# Altium PCB FC_MainBoard.PcbDoc (part 1 of 2)
Units mil, origin at the board's own origin, x right, y up, seen from the top; angles counter-clockwise.
Board outline 7630 x 3525 mil, 4 copper layers (Top Layer, Mid-Layer 1, Mid-Layer 2, Bottom Layer); 75 components, 79 nets, 708 pads, 334 vias.
Unrouted connection lines stored in the file: 1.
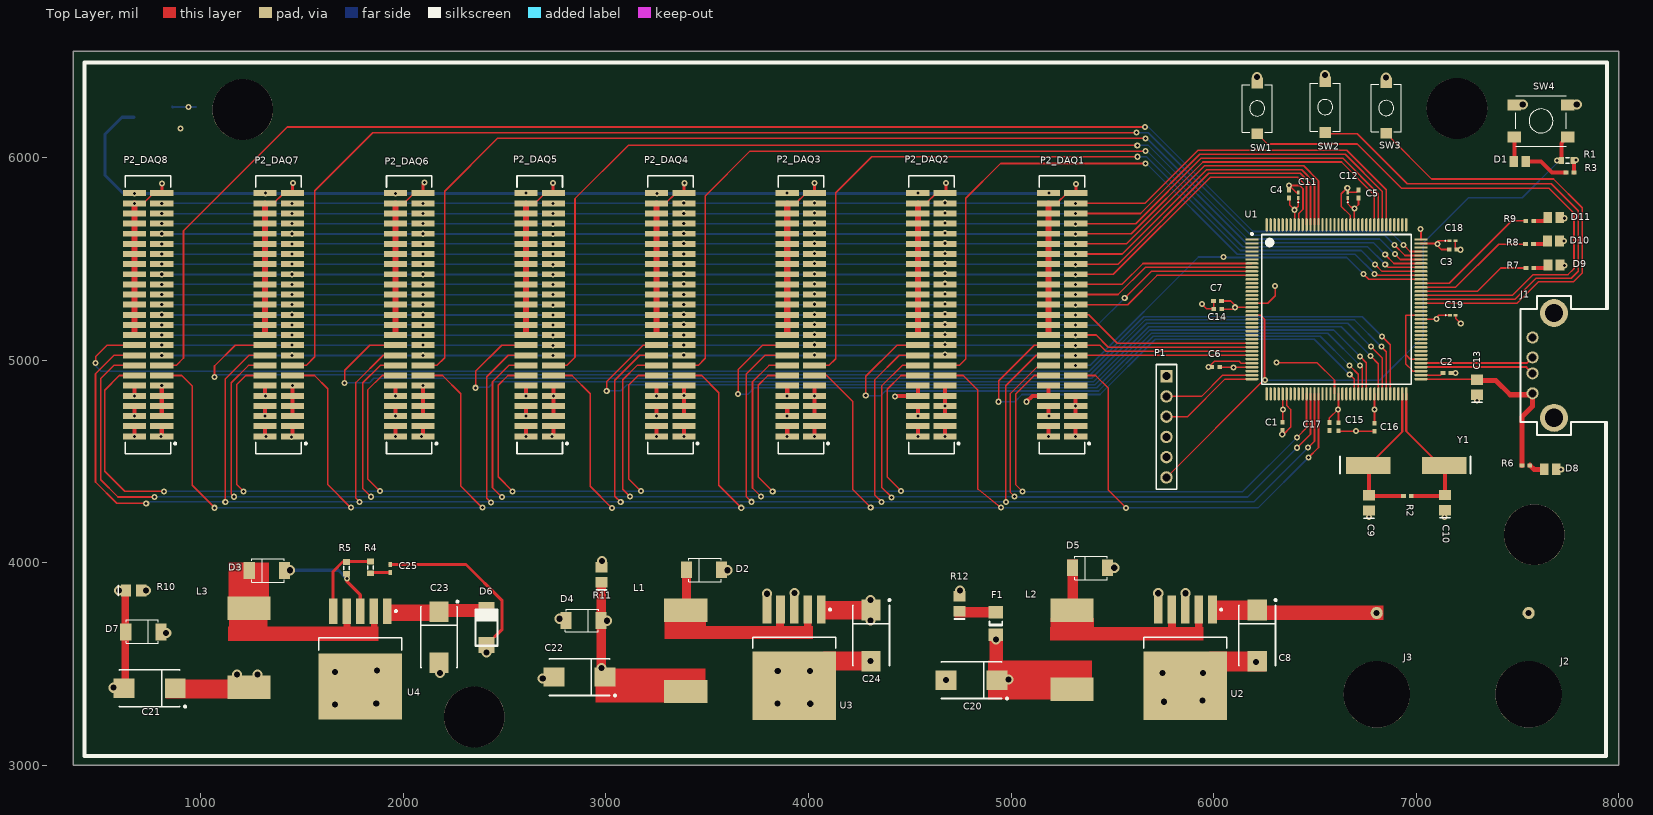
[diagram p0: Top Layer view]
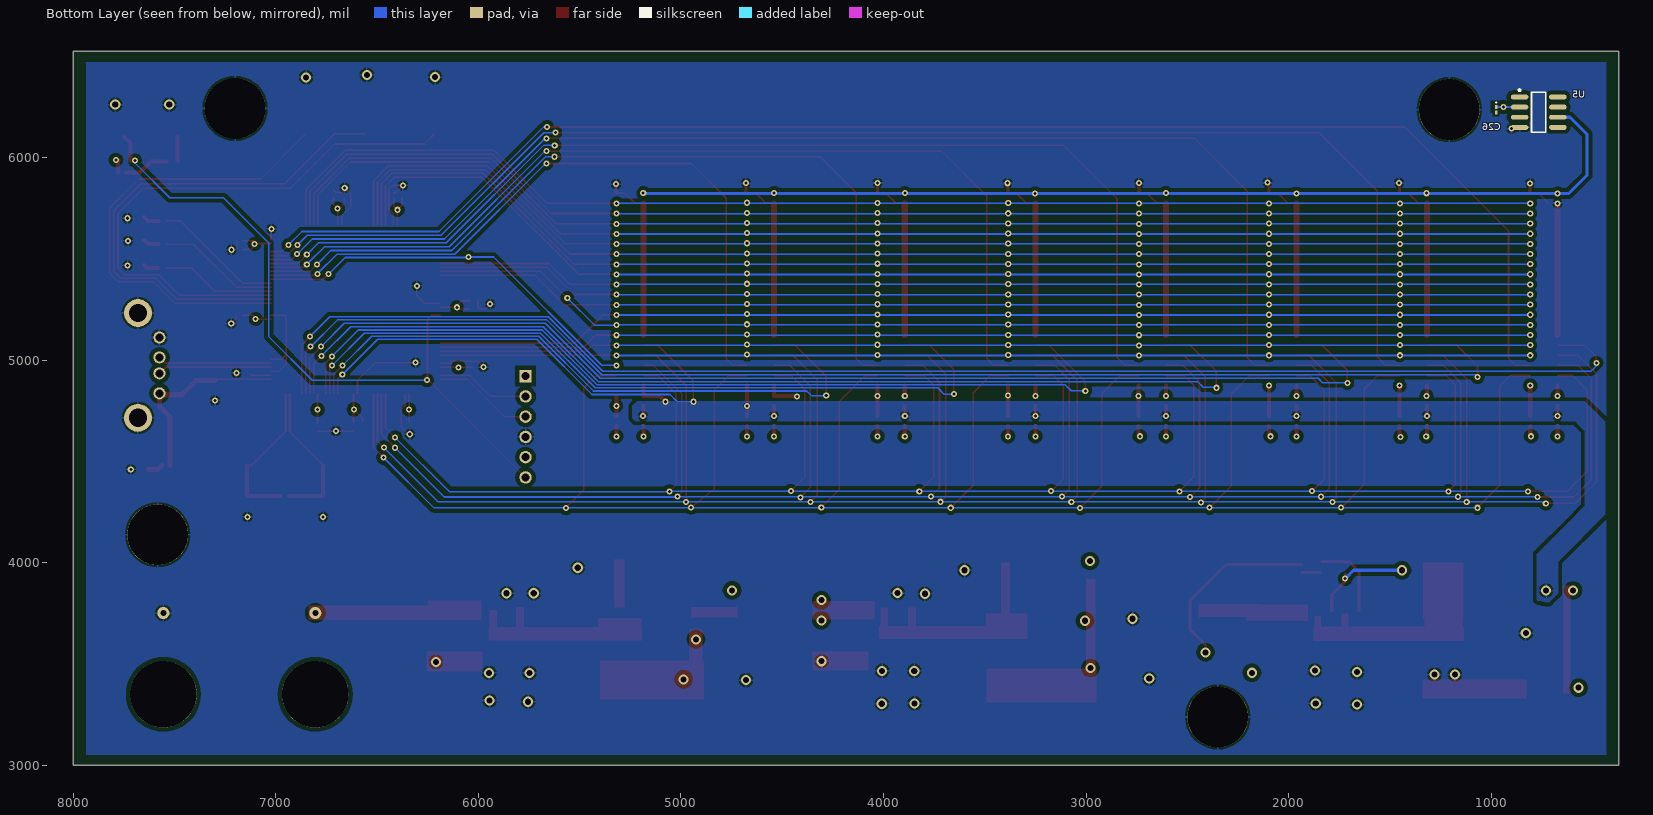
[diagram p1: Bottom Layer view, seen from below]
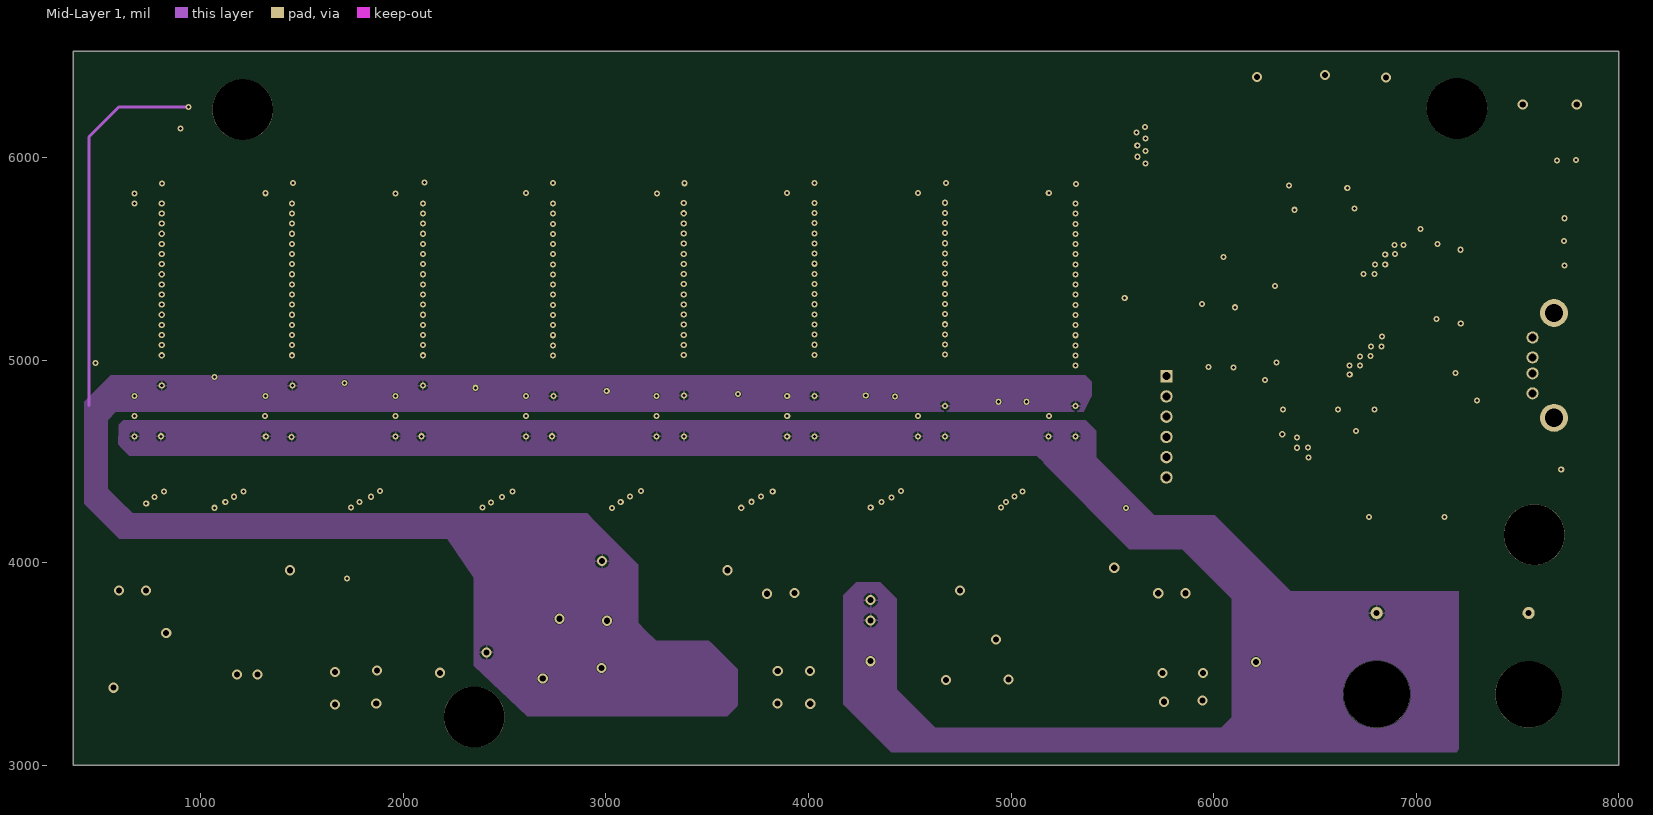
[diagram p2: Mid-Layer 1]
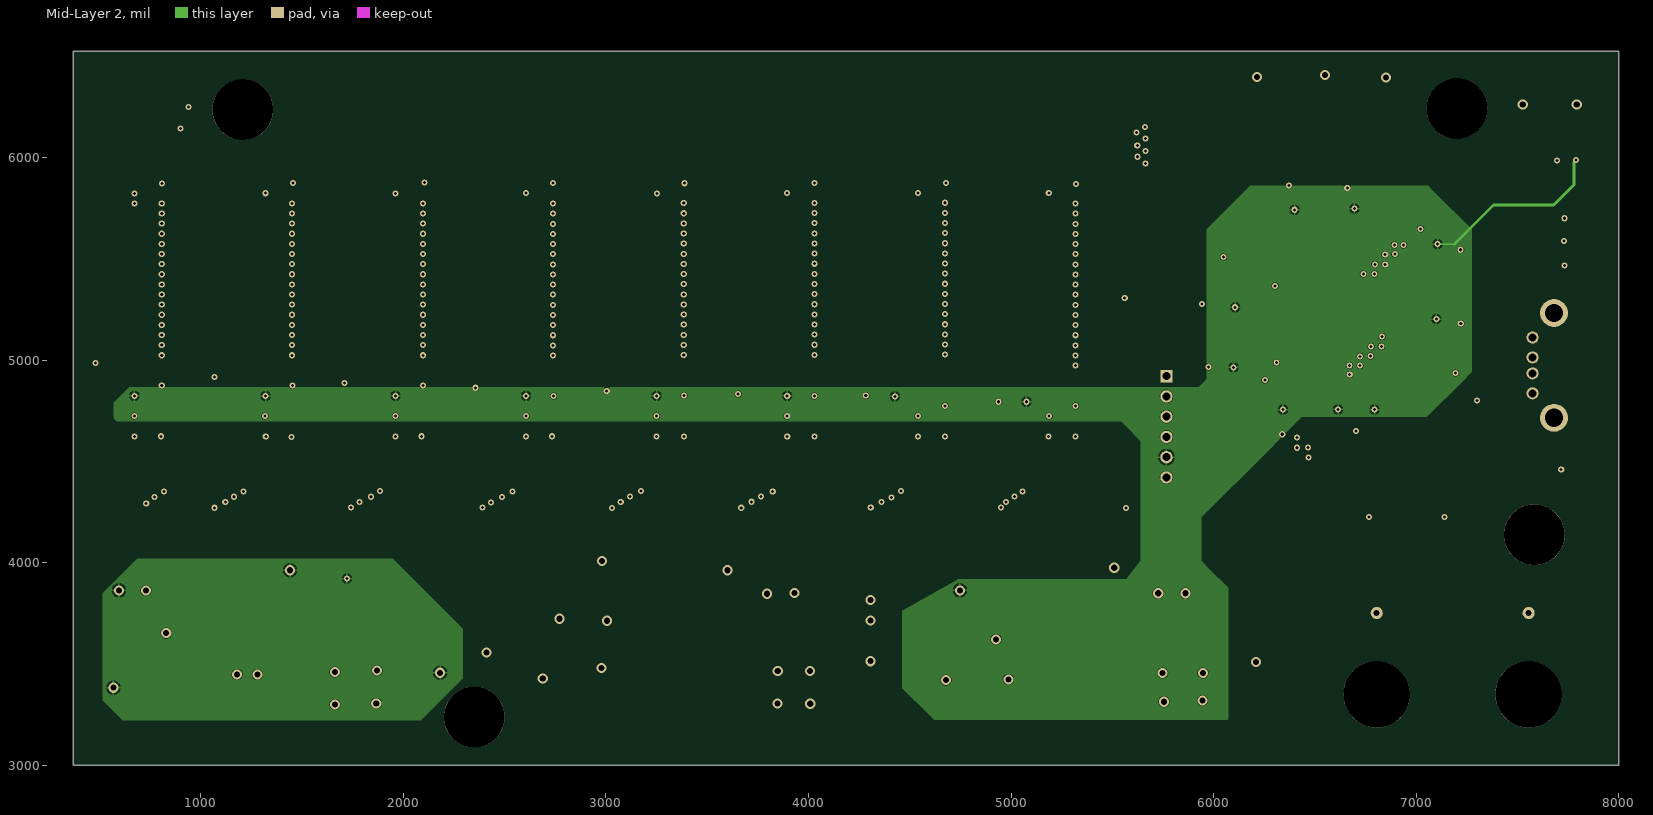
[diagram p3: Mid-Layer 2]

## Layer stack, top to bottom
Top Solder: solder mask 0.4, Solder Resist, Dk 3.5
Top Layer: signal copper 1.4
Dielectric 1: dielectric 12.6, FR-4, Dk 4.8
Mid-Layer 1: signal copper 1.4
Dielectric2: dielectric 12.6, FR-4, Dk 4.8
Mid-Layer 2: signal copper 1.4
Dielectric3: dielectric 12.6, FR-4, Dk 4.8
Bottom Layer: signal copper 1.4
Bottom Solder: solder mask 0.4, Solder Resist, Dk 3.5

## Board outline
370,3000 8000,3000 8000,6525 370,6525

## Design rules (kind name [scope] priority, off if disabled: settings)
Clearance [All] p1: gap=20
Clearance "GND Poly Clearance" [InPolygon vs InPolygon] p2: gap=20
Clearance "Polygon Clearance" [InPolygon] p3: gap=20
ComponentClearance [All] p1 off: gap=10 collisioncheckmode=3 verticalgap=10 showdistances=FALSE
DiffPairsRouting [All] p1: maxlimit=10 minlimit=10 mostfreqgap=10 toplayer_minwidth=10 toplayer_maxwidth=30 toplayer_prefwidth=10 midlayer1_minwidth=10 midlayer1_maxwidth=30 midlayer1_prefwidth=10 midlayer2_minwidth=10 midlayer2_maxwidth=30 midlayer2_prefwidth=10 bottomlayer_minwidth=10 bottomlayer_maxwidth=30 bottomlayer_prefwidth=10 maxuncoupledlength=500
Height [All] p1 off: minheight=0 maxheight=1000 prefheight=500
HoleSize [All] p1: absolutevalues=TRUE maxlimit=400 minlimit=1 maxpercent=80.000 minpercent=20.000
MinimumSolderMaskSliver [All] p1: minsoldermaskwidth=0
PolygonConnect PolygonConnect_1 [All] p1: connectstyle=Relief reliefconductorwidth=10 reliefentries=4 polygonreliefangle="90 Angle" airgapwidth=10
PolygonConnect [All] p2 off: connectstyle=Relief reliefconductorwidth=10 reliefentries=4 polygonreliefangle="90 Angle" airgapwidth=10
RoutingVias [All] p1: holewidth=25 width=40 viastyle="Through Hole" minholewidth=10 minwidth=25 maxholewidth=50 maxwidth=55
SilkToSilkClearance [All] p1: silktosilkclearance=2
SilkToSolderMaskClearance [IsPad] p1: minsilkscreentomaskgap=2 clearancetoexposedcopper=TRUE
SolderMaskExpansion [All] p1: expansion=4
Width [All] p1: maxlimit=30 minlimit=8 preferedwidth=8 minimp=50.000000 maximp=50.000000 favimp=50.000000
23 further rules are at their usual default settings.

## Classes and differential pairs
net class S\T\B\Y\_DAQ[1..8]: S\T\B\Y\_DAQ1 S\T\B\Y\_DAQ2 S\T\B\Y\_DAQ3 S\T\B\Y\_DAQ4 S\T\B\Y\_DAQ5 S\T\B\Y\_DAQ6 S\T\B\Y\_DAQ7 S\T\B\Y\_DAQ8
net class C\S\_DAQ[1..8]: C\S\_DAQ1 C\S\_DAQ2 C\S\_DAQ3 C\S\_DAQ4 C\S\_DAQ5 C\S\_DAQ6 C\S\_DAQ7 C\S\_DAQ8
component class "uC Board": C1 C2 C3 C4 C5 C6 C7 C9 C10 C11 C12 C13 C14 C15 C16 C17 C18 C19 D1 D8 D9 D10 D11 J1 P1 R1 R2 R3 R6 R7 R8 R9 SW1 SW2 SW3 SW4 U1 Y1
component class Power: C8 C20 C21 C22 C23 C24 C25 C26 D2 D3 D4 D5 D6 D7 F1 J2 J3 L1 L2 L3 R4 R5 R10 R11 R12 U2 U3 U4 U5
channel class DAQ_Header: DAQ1 DAQ2 DAQ3 DAQ4 DAQ5 DAQ6 DAQ7 DAQ8
component class DAQ8: P2_DAQ8
component class DAQ7: P2_DAQ7
component class DAQ6: P2_DAQ6
component class DAQ5: P2_DAQ5
component class DAQ4: P2_DAQ4
component class DAQ3: P2_DAQ3
component class DAQ2: P2_DAQ2
component class DAQ1: P2_DAQ1

## Components (designator, comment, footprint, x,y, rotation, side; value= is the part's Value field where it differs from the comment)
C1 "C0402" 0402 6341,4674 r90 top
C2 "C0402" 0402 7151.67,4936.19 r180 top
C3 "C0402" 0402 7182.31,5546 r180 top
C4 "C0402" 0402 6372.31,5820 r270 top
C5 "C0402" 0402 6715.31,5820 r270 top
C6 "C0402" 0402 6010,4966 r0 top
C7 "C0402" 0402 6019.31,5292 r0 top
C8 "399-3905-2-ND" 7343 6215,3640 r270 top
C9 "C0805" 0805 6767.31,4295 r90 top
C10 "C0805" 0805 7141.31,4297 r90 top
C11 "C0603" 0603 6417.14,5814.5 r90 top
C12 "C0603" 0603 6661.31,5815 r90 top
C13 "C0805" 0805 7299.13,4866.54 r90 top
C14 "C0402" 0402 6020.31,5252 r0 top
C15 "C0402" 0402 6617,4671 r90 top
C16 "C0402" 0402 6794,4669 r90 top
C17 "C0402" 0402 6571,4673 r90 top
C18 "C0603" 0603 7179.31,5590 r0 top
C19 "C0603" 0603 7181.31,5221 r0 top
C20 "399-10429-1-ND" 7343 4805,3420 r180 top
C21 "399-3905-2-ND" 7343 747,3380 r180 top
C22 "399-3778-1-ND" 7343 2869,3435 r180 top
C23 "399-3905-2-ND" 7343 2176.15,3632.26 r270 top
C24 "399-3905-2-ND" 7343 4309,3640 r270 top
C25 "C0402" 0402 1935.04,3971.39 r90 top
C26 "C0603" 0603 975.38,6236.53 r270 bottom
D1 "LED YELLOW" C0805 7511.31,5981 r180 top
D2 "PMEG4050EP,115" PMEG4050EP,115 3484,3965 r180 top
D3 "PMEG4050EP,115" PMEG4050EP,115 1325.91,3962.04 r180 top
D4 "DZ2406200L" DZ2406200L 2869,3715 r0 top
D5 "PMEG4050EP,115" PMEG4050EP,115 5390,3975 r180 top
D6 "RSX501L-20TE25" RSX501L-20TE25 2410.22,3678.62 r90 top
D7 "PMEG4050EP,115" PMEG4050EP,115 715.85,3658.46 r0 top
D8 "LED GREEN" C0805 7661.31,4461 r0 top
D9 "LED GREEN" C0805 7679.85,5469.94 r0 top
D10 "LED GREEN" C0805 7677.22,5588.14 r0 top
D11 "LED GREEN" C0805 7678.7,5703.42 r0 top
F1 "TR/3216FF750-R" 1206 4925,3700 r90 top
J1 "USB-A-S-F-B-TH" "USB-A CONNECTOR" 7829.31,4974 r90 top
J2 "J152-ND Black" "BANANA JACK" 7555,3350 r90 top
J3 "J151-ND Red" "BANANA JACK" 6805,3350 r90 top
L1 "CDRH127/LDNP-680MC" CDRH127/LDNP-680MC 3394,3555 r0 top
L2 "SRR1280-470M" SRR1280-470M 5300,3555 r0 top
L3 "SRR1260-330M" SRR1260-330M 1237,3565 r0 top
P1 "TSW-106-07-F-S" SMTC-TSW-106-07-X-S 5767,4921 r270 top
P2_DAQ1 "TFM-125-02-L-D" TFM-125-02-X-D 5251.5,5224 r90 top (schematic designator P2)
P2_DAQ2 "TFM-125-02-L-D" TFM-125-02-X-D 4606.93,5224 r90 top (schematic designator P2)
P2_DAQ3 "TFM-125-02-L-D" TFM-125-02-X-D 3962.36,5224 r90 top (schematic designator P2)
P2_DAQ4 "TFM-125-02-L-D" TFM-125-02-X-D 3317.79,5224 r90 top (schematic designator P2)
P2_DAQ5 "TFM-125-02-L-D" TFM-125-02-X-D 2673.21,5224 r90 top (schematic designator P2)
P2_DAQ6 "TFM-125-02-L-D" TFM-125-02-X-D 2028.64,5224 r90 top (schematic designator P2)
P2_DAQ7 "TFM-125-02-L-D" TFM-125-02-X-D 1384.07,5224 r90 top (schematic designator P2)
P2_DAQ8 "TFM-125-02-L-D" TFM-125-02-X-D 739.5,5224 r90 top (schematic designator P2)
R1 "Res3" J1-0603 7746.31,5986 r0 top
R2 "Res3" 0402 6956.31,4330 r180 top
R3 "Res3" 0402 7759.2,5926.09 r0 top
R4 "Res3" J1-0603 1837.59,3976.52 r90 top
R5 "Res3" J1-0603 1719.61,3973.95 r270 top
R6 "Res3" 0402 7541.31,4481 r180 top
R7 "Res3" 0402 7561.13,5454.6 r180 top
R8 "Res3" 0402 7559.02,5572.64 r180 top
R9 "Res3" 0402 7560.58,5687.71 r180 top
R10 "5106" 0805 667.66,3863.74 r0 top
R11 "5106" 0805 2979,3940 r90 top
R12 "5106" 0805 4745.6,3796.83 r90 top
SW1 "434113025826" 434113025826 6215.31,6242.59 r90 top (schematic designator SW2)
SW2 "434113025826" 434113025826 6550.65,6249.27 r90 top (schematic designator SW3)
SW3 "434113025826" 434113025826 6852.02,6244.58 r90 top (schematic designator SW4)
SW4 "430453025836" 430453025836 7616.31,6181 r0 top (schematic designator SW1)
U1 "PIC32MZ2048EFH144-I/PL" MCHP-LQFP-PL144_N 6606.31,5251 r0 top
U2 "LM2596S-3.3/NOPB" TS5B_M 5860,3530 r270 top
U3 "LM2596S-5.0/NOPB" TS5B_M 3929,3530 r270 top
U4 "LM2596S-5.0/NOPB" TS5B_N 1787,3525 r270 top
U5 "ADR421ARZ" ADI-R-8_N 765.16,6224.1 r180 bottom
Y1 "24MHz" HC49US 6946.31,4496 r0 top

## Footprints (in the part's own frame and the unit in brackets; to place one, negate y for a bottom-side part, rotate by r counter-clockwise, add the part's x,y. Pads: shape width x height; smd on the part's side, far side on the other; paste and mask are expansions set on the pad)
0402 [mm] "Chip Capacitor, Body 1.0x0.5mm, IPC High Density"
  rect 0.6x0.5 smd: 1(-0.5,0) 2(0.5,0)
  body extent -0.55,-0.3 0.55,0.3, height 1.3
0603 [mm] "Chip Inductor, Body 0.6x0.3mm, IPC High Density"
  rect 0.5x0.3 smd: 1(-0.35,0) 2(0.35,0)
  silkscreen extent -0.9,-0.05 -0.9,0.05, body extent -0.33,-0.18 0.33,0.18, height 0.55
0805 [mm] "Chip Capacitor; Body 2.0 x 1.2 mm (LxW typ)"
  rect 1.3x1.5 smd: 1(-0.95,0) 2(0.95,0)
  silkscreen extent -1.9,-0.65 -1.9,0.65
1206 [mm] "Chip Capacitor; Body 3.2 x 1.6 mm (LxW typ)"
  rect 1.6x1.8 smd: 1(-1.4,0) 2(1.4,0)
  silkscreen extent -0.3,-0.8 0.3,0.8
7343 [mm] "Capacitor, SM Tantalum; Body 7.3 x 4.3 mm (LxW typ)"
  rect 2.6x2.4 smd: 1(-3.2,0) 2(3.2,0)
  silkscreen extent -4.57,-2.3 3.8,2.43
430453025836 [mm] "6*6mm washable vertical type, J-Bend SMD, height 2.5mm, salmon actuator, 360gf, T&R"
  rect 1.7x1.4 smd: 1(-3.35,2) 2(3.35,2) 3(-3.35,-2) 4(3.35,-2)
  silkscreen extent -3.15,-3.15 3.15,3.15, body extent -3.6,-3.1 3.6,3.1, height 2.5
434113025826 [mm] "6.0*3.8mm vertical type, J-Bend SMD, height 2.5mm, white actuator, 260gf, T&R"
  rect 1.35x1.4 smd: 1(-3.175,0) 2(3.175,0)
  silkscreen extent -3,-1.9 3,1.9, body extent -3.5,-1.95 3.5,1.95, height 2.5
ADI-R-8_N [mm] "SOIC, 8-Leads, Body 4.9x3.9mm, Pitch 1.27mm, IPC Medium Density"
  oval 2.2x0.6 smd: 1(-2.4,1.905) 2(-2.4,0.635) 3(-2.4,-0.635) 4(-2.4,-1.905) 5(2.4,-1.905) 6(2.4,-0.635) 7(2.4,0.635) 8(2.4,1.905)
  silkscreen extent -2.53,-2.5 0.9,2.88, body extent -2,-2.5 2,2.5, height 1.75
"BANANA JACK" [mil]
  round 327.95 hole 327.95: 0(0,0)
  round 60 hole 30: 1(401.57,0)
C0805 [mm] "Chip Capacitor, Body 2.0x1.3mm, IPC High Density"
  rect 1.1x1.4 smd: 1(-0.75,0) 2(0.75,0)
  body extent -1.1,-0.72 1.1,0.72, height 1.4
CDRH127/LDNP-680MC [mm] "Non-standard package, shielded inductor"
  rect 5.4x2.9 smd: 1(0,5.334) 2(0,-4.826)
  body extent -5.97,-5.33 5.84,5.84, height 0.45
DZ2406200L [mm]
  rect 1.4x2.1 smd: 1(-1.692,0) 2(2.708,0)
  silkscreen extent -1.75,-1.4 2.41,1.4
HC49US [mm]
  rect 5.6x2.1 smd: 1(-4.632,-0.421) 2(4.893,-0.421)
  silkscreen extent -8.19,-1.44 8.2,0.72, body extent -7.68,-1.94 7.81,1.23, height 0.55
J1-0603 [mm] "Chip Resistor, Body 1.6x0.8mm, IPC High Density"
  rect 0.7x0.9 smd: 1(-0.75,0) 2(0.75,0)
  silkscreen extent -0.2,-0.35 0.2,0.35, body extent -0.85,-0.48 0.85,0.48, height 0.9
MCHP-LQFP-PL144_N [mm] "QFP, 144-Leads, Body 20x20mm, Pitch 0.5mm, IPC Medium Density"
  oval 1.65x0.3 smd: 1(-10.6,8.75) 2(-10.6,8.25) 3(-10.6,7.75) 4(-10.6,7.25) 5(-10.6,6.75) 6(-10.6,6.25) 7(-10.6,5.75) 8(-10.6,5.25) 9(-10.6,4.75) 10(-10.6,4.25) 11(-10.6,3.75) 12(-10.6,3.25) 13(-10.6,2.75) 14(-10.6,2.25) 15(-10.6,1.75) 16(-10.6,1.25) 17(-10.6,0.75) 18(-10.6,0.25) 19(-10.6,-0.25) 20(-10.6,-0.75) 21(-10.6,-1.25) 22(-10.6,-1.75) 23(-10.6,-2.25) 24(-10.6,-2.75) 25(-10.6,-3.25) 26(-10.6,-3.75) 27(-10.6,-4.25) 28(-10.6,-4.75) 29(-10.6,-5.25) 30(-10.6,-5.75) 31(-10.6,-6.25) 32(-10.6,-6.75) 33(-10.6,-7.25) 34(-10.6,-7.75) 35(-10.6,-8.25) 36(-10.6,-8.75) 73(10.6,-8.75) 74(10.6,-8.25) 75(10.6,-7.75) 76(10.6,-7.25) 77(10.6,-6.75) 78(10.6,-6.25) 79(10.6,-5.75) 80(10.6,-5.25) 81(10.6,-4.75) 82(10.6,-4.25) 83(10.6,-3.75) 84(10.6,-3.25) 85(10.6,-2.75) 86(10.6,-2.25) 87(10.6,-1.75) 88(10.6,-1.25) 89(10.6,-0.75) 90(10.6,-0.25) 91(10.6,0.25) 92(10.6,0.75) 93(10.6,1.25) 94(10.6,1.75) 95(10.6,2.25) 96(10.6,2.75) 97(10.6,3.25) 98(10.6,3.75) 99(10.6,4.25) 100(10.6,4.75) 101(10.6,5.25) 102(10.6,5.75) 103(10.6,6.25) 104(10.6,6.75) 105(10.6,7.25) 106(10.6,7.75) 107(10.6,8.25) 108(10.6,8.75)
  oval 0.3x1.65 smd: 37(-8.75,-10.6) 38(-8.25,-10.6) 39(-7.75,-10.6) 40(-7.25,-10.6) 41(-6.75,-10.6) 42(-6.25,-10.6) 43(-5.75,-10.6) 44(-5.25,-10.6) 45(-4.75,-10.6) 46(-4.25,-10.6) 47(-3.75,-10.6) 48(-3.25,-10.6) 49(-2.75,-10.6) 50(-2.25,-10.6) 51(-1.75,-10.6) 52(-1.25,-10.6) 53(-0.75,-10.6) 54(-0.25,-10.6) 55(0.25,-10.6) 56(0.75,-10.6) 57(1.25,-10.6) 58(1.75,-10.6) 59(2.25,-10.6) 60(2.75,-10.6) 61(3.25,-10.6) 62(3.75,-10.6) 63(4.25,-10.6) 64(4.75,-10.6) 65(5.25,-10.6) 66(5.75,-10.6) 67(6.25,-10.6) 68(6.75,-10.6) 69(7.25,-10.6) 70(7.75,-10.6) 71(8.25,-10.6) 72(8.75,-10.6) 109(8.75,10.6) 110(8.25,10.6) 111(7.75,10.6) 112(7.25,10.6) 113(6.75,10.6) 114(6.25,10.6) 115(5.75,10.6) 116(5.25,10.6) 117(4.75,10.6) 118(4.25,10.6) 119(3.75,10.6) 120(3.25,10.6) 121(2.75,10.6) 122(2.25,10.6) 123(1.75,10.6) 124(1.25,10.6) 125(0.75,10.6) 126(0.25,10.6) 127(-0.25,10.6) 128(-0.75,10.6) 129(-1.25,10.6) 130(-1.75,10.6) 131(-2.25,10.6) 132(-2.75,10.6) 133(-3.25,10.6) 134(-3.75,10.6) 135(-4.25,10.6) 136(-4.75,10.6) 137(-5.25,10.6) 138(-5.75,10.6) 139(-6.25,10.6) 140(-6.75,10.6) 141(-7.25,10.6) 142(-7.75,10.6) 143(-8.25,10.6) 144(-8.75,10.6)
  silkscreen extent -10.72,-9.37 9.37,9.57, body extent -10,-10 10,10, height 1.6
PMEG4050EP,115 [mm]
  rect 1.4x2.1 smd: 1(-2.2,0) 2(2.2,0)
  silkscreen extent -2.16,-1.45 1.91,1.5
RSX501L-20TE25 [mm]
  rect 2x2 smd: 1(-2.15,0) 2(2.25,0)
  silkscreen extent -2.25,-1.39 2.3,1.4
SMTC-TSW-106-07-X-S [mm] ".025 SQ Post Terminal Strip Assembly, 1x6 Pins, Vertical, 2.54mm Pitch, Male"
  rect 1.55x1.55 hole 1.02: 1(0,0)
  round 1.55 hole 1.02: 2(2.54,0) 3(5.08,0) 4(7.62,0) 5(10.16,0) 6(12.7,0)
  silkscreen extent -1.46,-1.27 14.16,1.27, body extent -1.27,-1.24 13.97,1.3, height 8.58
SRR1260-330M [mm]
  rect 5.4x2.9 smd: 1(0,5.334) 2(0,-4.572)
  body extent -5.97,-5.33 5.84,6.1, height 0.45
SRR1280-470M [mm]
  rect 5.4x2.9 smd: 1(0,5.334) 2(0,-4.572)
  body extent -5.97,-5.33 5.84,6.1, height 0.45
TFM-125-02-X-D [mm] "1.27mm pitch, 50 pin, terminal strip; SMT"
  rect 0.75x2.9 smd mask+0: 1(-15.24,-1.715) 2(-15.24,1.714) 3(-13.97,-1.715) 4(-13.97,1.714) 5(-12.7,-1.715) 6(-12.7,1.714) 7(-11.43,-1.715) 8(-11.43,1.714) 9(-10.16,-1.715) 10(-10.16,1.714) 11(-8.89,-1.715) 12(-8.89,1.714) 13(-7.62,-1.715) 14(-7.62,1.714) 15(-6.35,-1.715) 16(-6.35,1.714) 17(-5.08,-1.715) 18(-5.08,1.714) 19(-3.81,-1.715) 20(-3.81,1.714) 21(-2.54,-1.715) 22(-2.54,1.714) 23(-1.27,-1.715) 24(-1.27,1.714) 25(0,-1.715) 26(0,1.714) 27(1.27,-1.715) 28(1.27,1.714) 29(2.54,-1.715) 30(2.54,1.714) 31(3.81,-1.715) 32(3.81,1.714) 33(5.08,-1.715) 34(5.08,1.714) 35(6.35,-1.715) 36(6.35,1.714) 37(7.62,-1.715) 38(7.62,1.714) 39(8.89,-1.715) 40(8.89,1.714) 41(10.16,-1.715) 42(10.16,1.714) 43(11.43,-1.715) 44(11.43,1.714) 45(12.7,-1.715) 46(12.7,1.714) 47(13.97,-1.715) 48(13.97,1.714) 49(15.24,-1.715) 50(15.24,1.714)
  silkscreen extent -17.45,-3.53 17.45,2.85, body extent -17.97,-3.67 17.97,3.67, height 5.72
TS5B_M [mm] "D2-PAK, 6-Leads, Body 8.6x10.2mm, Pitch 1.7mm, Lead Span 14.1mm, IPC Low Density"
  rect 3.5x1.1 smd: 1(-6.05,3.4) 2(-6.05,1.7) 3(-6.05,0) 4(-6.05,-1.7) 5(-6.05,-3.4)
  rect 8.6x10.5 smd: 6(3.5,0)
  silkscreen extent -6.17,-5.2 -1.2,5.2, body extent -2.6,-5.2 6.29,5.2, height 4.65
TS5B_N [mm] "D2-PAK, 6-Leads, Body 8.6x10.2mm, Pitch 1.7mm, Lead Span 14.1mm, IPC Medium Density"
  rect 3.2x1.05 smd: 1(-6,3.4) 2(-6,1.7) 3(-6,0) 4(-6,-1.7) 5(-6,-3.4)
  rect 8.3x10.45 smd: 6(3.45,0)
  silkscreen extent -6.12,-5.2 -1.1,5.2, body extent -2.65,-5.2 6.24,5.2, height 4.65
"USB-A CONNECTOR" [mm]
  round 1.508 hole 1 mask+0.076: 1(-3.5,6.477) 2(-1,6.477) 3(1,6.477) 4(3.5,6.477)
  round 3.5 hole 2.3 mask+0.075: 5(-6.57,3.777) 6(6.57,3.777)
  silkscreen extent -8.7,-2.99 8.7,7.98

## Part data
C1 C2 C3 C4 C5 C6 C7 C9 C10 C11 C12 C13 C14 C15 C16 C17 C18 C19 C25 C26: "Ceramic Chip Capacitor - Standard"
C8 C21 C23 C24: library part CWR11DH476M, "CAP TANT 47UF 35V 10% 2917"
C20: library part CWR11DH476M, "CAP TANT 220uF 16V 10% 2917"
C22: library part CWR11DH476M, "CAP TANT 150UF 10V 10% 2917"
D1: library part LED_YELLOW, "Red LED; SMD 0805"
D2 D3 D5 D7: "Schottky Diode, 5A, 40V, SOD-128 Package"
D4: "DIODE ZENER 6.2V 2W TMINIP2. SOD-128"
D6: "DIODE SCHOTTKY 20V 5A PMDS"
D8 D9 D10 D11: library part LED_GREEN, "Green LED; SMD 0805"
F1: library part SF-0402F075-2, "FUSE BOARD MNT 750MA 32VAC 63VDC"
J1: library part "USB-A Connector", "USB-A Connector- Through Hole"
J2: library part "J-152-ND - Black", "CONN JACK BANANA INSUL NYLON BLA"
J3: "CONN JACK BANANA INSUL NYLON RED"
L1: "Non-standard package, shielded inductor, 68uH, 2.5A"
L2: "Non-standard, shielded, 47uH inductor"
L3: "Non-standard, shielded, inductor, 33uH"
P1: "0.025\" SQ Post Header, Through-hole, Vertical, -55 to 125 degC, 2.54 mm Pitch, 6-Pin, Male, RoHS"
P2_DAQ1 P2_DAQ2 P2_DAQ3 P2_DAQ4 P2_DAQ5 P2_DAQ6 P2_DAQ7 P2_DAQ8: library part "Header 25X2", "Header, 25-Pin, Dual row"
R1 R2 R3 R4 R5 R6 R7 R8 R9: "Resistor"
R10 R11 R12: library part Res3, "RES SMD 0.0 OHM JUMPER 1/2W 0805"
SW1 SW2 SW3: "WS-TASV J-Bend SMD Tact Switch 6.0X3.8 mm"
SW4: "WS-TASV J-Bend SMD Tact Switch 6X6 mm"
U1: library part PIC32MZ2048ECH144-I/PL, "32-Bit Microcontroller with Audio and Graphics Interfaces, HS USB, Ethernet, and Advanced Analog, 2048 KB Program Memory, 120 I/O Pins, PMP, Industrial Temperature, 144-Pin LQFP (PL144), Tray"
U2 U3 U4: "SIMPLE SWITCHER® Power Converter 150 KHz 3A Step-Down Voltage Regulator, 5-pin TO-263, Pb-Free"
U5: "Ultraprecision, Low Noise, XFET(R) Voltage Reference, 2.5 V Output, 4.5 to 18 V Supply, Industrial, 8-pin SOIC (R-8), Tube"
Y1: library part XTAL, "Crystal Oscillator"

## Free pads (board coordinates)
  round 300 hole 300: 0(1206.67,6236.86) 0(2349.56,3238.18) 0(7201.2,6242.51) 0(7583.1,4137.78)

## Via types
v1: diameter 30, hole 15, Top Layer to Bottom Layer, 289 vias
v2: diameter 50, hole 30, Top Layer to Bottom Layer, 45 vias

## Nets (pads, with @x,y where several pads share a name; then routed paths per layer and width w, separated by ;. In a path a pad name is that pad's centre, name@x,y a point inside that pad or via, vN(x,y) a via of type N, cw(c..) or ccw(c..) an arc to the next point about the centre after c; other vN are vias at no path point)
2V5REF: P2_DAQ1.50 P2_DAQ2.50 P2_DAQ3.50 P2_DAQ4.50 P2_DAQ5.50 P2_DAQ6.50 P2_DAQ7.50 P2_DAQ8.50 U5.6 | length 5078.8
  Bottom Layer w15: U5.6@670.68,6199.1 611.02,6199.1 526.03,6114.11 526.03,5913.88 617.3,5822.61 v1(671.6,5822.61) 5184,5822.61 v1(5186.11,5824.72)
  other v1: 1961.46,5821.91 3251.31,5823.31 1319.34,5824.02 3894.14,5824.72 4539.77,5825.42 2605.68,5826.12
3V3: C1.2 C2.2 C3.2 C4.2 C5.2 C6.2 C7.2 C11.1 C12.1 C14.2 C15.2 C16.2 C17.2 C18.1 C19.1 P1.5 P2_DAQ1.10 P2_DAQ1.12 P2_DAQ2.10 P2_DAQ2.12 P2_DAQ3.10 P2_DAQ3.12 P2_DAQ4.10 P2_DAQ4.12 P2_DAQ5.10 P2_DAQ5.12 P2_DAQ6.10 P2_DAQ6.12 P2_DAQ7.10 P2_DAQ7.12 P2_DAQ8.10 P2_DAQ8.12 R1.2 R3.2 R12.2 U1.18 U1.33 U1.41 U1.55 U1.64 U1.74 U1.88 U1.107 U1.122 U1.137 | length 3443.3
  Top Layer w8: C6.2@6029.69,4966 6030.12,4965.57 U1.33@6188.99,4965.57 ; C7.2@6039,5292 6084,5292 v1@6115.16,5260.84 ; C14.2@6040,5252 6106.31,5252 v1@6115.16,5260.84 ; U1.18@6188.99,5260.84 v1@6115.16,5260.84 ; U1.41@6340.57,4833.68 6341,4833.24 C1.2@6341,4693.69 ; C4.2@6372.31,5800.31 6375.93,5796.7 6375.93,5766 v1(6399.62,5742.31) ; U1.137@6399.62,5668.32 v1(6399.62,5742.31) ; C11.1@6417.14,5800.72 6417.14,5759.83 v1(6399.62,5742.31) ; C17.2@6571,4692.69 6571,4713.84 v1@6616.16,4759 ; U1.55@6616.16,4833.68 v1@6616.16,4759 ; C15.2@6617,4690.69 6616.16,4691.53 v1@6616.16,4759 ; C12.1@6661.31,5801.22 6661.31,5773 6686.73,5747.58 v1(6694.9,5747.58) ; U1.122@6694.9,5668.32 v1(6694.9,5747.58) ; C5.2@6715.31,5800.31 6715.31,5768 v1(6694.9,5747.58) ; U1.64@6793.32,4833.68 6794,4833 C16.2@6794,4688.69 ; U1.74@7023.64,4926.2 7121.99,4926.2 C2.2@7131.98,4936.19 ; U1.88@7023.64,5201.79 7091.53,5201.79 7110.74,5221 C19.1@7167.53,5221 ; U1.107@7023.64,5575.8 v1@7094.51,5575.8 ; C3.2@7162.63,5546 7124.31,5546 v1@7094.51,5575.8 ; C18.1@7165.53,5590 7108.71,5590 v1@7094.51,5575.8
  Top Layer w20: v1(672,4824) P2_DAQ8.12@672,4874 ; P2_DAQ7.10@1316.57,4824 P2_DAQ7.12@1316.57,4874 ; v1(1961.14,4824) P2_DAQ6.12@1961.14,4874 ; v1(2605.71,4824) P2_DAQ5.12@2605.71,4874 ; v1(3250.29,4824) P2_DAQ4.12@3250.29,4874 ; v1(3894.86,4824) P2_DAQ3.12@3894.86,4874 ; v1@4429.11,4824 P2_DAQ2.10@4539.43,4824 P2_DAQ2.12@4539.43,4874 ; v1(5075.61,4794.65) 5104.95,4824 P2_DAQ1.10@5184,4824 P2_DAQ1.12@5184,4874 ; R1.2@7775.84,5986 7778.89,5982.96 R3.2@7778.89,5926.09
  Mid-Layer 2 w8: v1(7105.31,5573) 7189.43,5573
  Mid-Layer 2 w15: 7189.43,5573 7381.97,5765.54 7678.73,5765.54 7778.56,5865.37 7778.56,5977.51 v1(7789.49,5988.44)
  other v1: 6342,4756 6794.19,4755.76 6614,4756.84 4426.12,4821.01 1319.45,4822.72 6098,4964 7099.31,5203 6106.31,5261
  other v2: 4747.41,3863.61
3V3O: D5.2 L2.1 U2.2 U2.4
3V3R: C20.1 F1.1 L2.2
  other v2: 4986.71,3424.03 4926.02,3621.54
5V: C25.2 C26.1 D6.1 P2_DAQ1.5 P2_DAQ1.7 P2_DAQ1.9 P2_DAQ1.11 P2_DAQ2.5 P2_DAQ2.7 P2_DAQ2.9 P2_DAQ2.11 P2_DAQ3.5 P2_DAQ3.7 P2_DAQ3.9 P2_DAQ3.11 P2_DAQ4.5 P2_DAQ4.7 P2_DAQ4.9 P2_DAQ4.11 P2_DAQ5.5 P2_DAQ5.7 P2_DAQ5.9 P2_DAQ5.11 P2_DAQ6.5 P2_DAQ6.7 P2_DAQ6.9 P2_DAQ6.11 P2_DAQ7.5 P2_DAQ7.7 P2_DAQ7.9 P2_DAQ7.11 P2_DAQ8.5 P2_DAQ8.7 P2_DAQ8.9 P2_DAQ8.11 R11.2 U5.2 | length 4022
  Top Layer w15: C25.2@1935.04,3991.08 2309.03,3991.08 2487.73,3812.38 2487.73,3671.49 D6.1@2410.22,3593.98
  Top Layer w20: P2_DAQ8.5@807,4724 P2_DAQ8.7@807,4774 P2_DAQ8.9@807,4824 v1(807,4874) ; P2_DAQ7.5@1451.57,4724 P2_DAQ7.7@1451.57,4774 P2_DAQ7.9@1451.57,4824 v1(1451.57,4874) ; P2_DAQ6.5@2096.14,4724 P2_DAQ6.7@2096.14,4774 P2_DAQ6.9@2096.14,4824 v1(2096.14,4874) ; P2_DAQ5.5@2740.71,4724 P2_DAQ5.7@2740.71,4774 P2_DAQ5.9@2740.71,4824 P2_DAQ5.11@2740.71,4874 ; P2_DAQ4.5@3385.29,4724 P2_DAQ4.7@3385.29,4774 P2_DAQ4.9@3385.29,4824 P2_DAQ4.11@3385.29,4874 ; P2_DAQ3.5@4029.86,4724 P2_DAQ3.7@4029.86,4774 P2_DAQ3.9@4029.86,4824 P2_DAQ3.11@4029.86,4874 ; P2_DAQ2.5@4674.43,4724 v1(4674.43,4774) P2_DAQ2.9@4674.43,4823.58 ; P2_DAQ2.11@4674.43,4874 P2_DAQ2.9@4674.43,4824 ; P2_DAQ1.5@5319,4724 v1(5319,4774) P2_DAQ1.9@5319,4824 ; P2_DAQ2.9@4674.43,4823.58 4674.22,4823.79 P2_DAQ2.9@4674.43,4824 ; P2_DAQ2.9@4674.43,4823.58 P2_DAQ2.9@4674.43,4824
  Mid-Layer 1 w15: 447.42,4776.79 447.42,6102.22 595.23,6250.03 v1(938.7,6250.03)
  Bottom Layer w10: U5.2@860.86,6250.31 C26.1@975.38,6250.31
  Bottom Layer w15: U5.2@859.65,6249.1 U5.2@860.86,6250.31
  other v1: 2741.79,4822.77 4028.77,4822.77 3385.28,4825.49
  other v2: 2410.31,3557.53 2980.64,4008.27
5VO: D2.2 L1.1 U3.2 U3.4
5VR: C22.1 D4.2 L1.2 R11.1
  other v2: 2977.96,3479.9 3005.69,3713.48
24V: C8.1 C24.1 J3.1 P2_DAQ1.1 P2_DAQ1.2 P2_DAQ1.3 P2_DAQ1.4 P2_DAQ2.1 P2_DAQ2.2 P2_DAQ2.3 P2_DAQ2.4 P2_DAQ3.1 P2_DAQ3.2 P2_DAQ3.3 P2_DAQ3.4 P2_DAQ4.1 P2_DAQ4.2 P2_DAQ4.3 P2_DAQ4.4 P2_DAQ5.1 P2_DAQ5.2 P2_DAQ5.3 P2_DAQ5.4 P2_DAQ6.1 P2_DAQ6.2 P2_DAQ6.3 P2_DAQ6.4 P2_DAQ7.1 P2_DAQ7.2 P2_DAQ7.3 P2_DAQ7.4 P2_DAQ8.1 P2_DAQ8.2 P2_DAQ8.3 P2_DAQ8.4 U2.1 U3.1 | length 800
  Top Layer w20: v1(672,4624) P2_DAQ8.4@672,4674 ; P2_DAQ8.1@807,4624 P2_DAQ8.3@807,4674 ; P2_DAQ7.2@1316.57,4624 P2_DAQ7.4@1316.57,4674 ; P2_DAQ7.1@1451.57,4624 P2_DAQ7.3@1451.57,4674 ; v1(1961.14,4624) P2_DAQ6.4@1961.14,4674 ; P2_DAQ6.1@2096.14,4624 P2_DAQ6.3@2096.14,4674 ; v1(2605.71,4624) P2_DAQ5.4@2605.71,4674 ; P2_DAQ5.1@2740.71,4624 P2_DAQ5.3@2740.71,4674 ; v1(3250.29,4624) P2_DAQ4.4@3250.29,4674 ; v1(3385.29,4624) P2_DAQ4.3@3385.29,4674 ; v1(3894.86,4624) P2_DAQ3.4@3894.86,4674 ; v1(4029.86,4624) P2_DAQ3.3@4029.86,4674 ; v1(4539.43,4624) P2_DAQ2.4@4539.43,4674 ; v1(4674.43,4624) P2_DAQ2.3@4674.43,4674 ; v1(5184,4624) P2_DAQ1.4@5184,4674 ; v1(5319,4624) P2_DAQ1.3@5319,4674
  other v1: 1447.9,4621.25 802.65,4624.12 1320.55,4623.59 2088.86,4624.11 2734.12,4624.11
  other v2: 4306.74,3715.14 4306.74,3814.96
C\S\_DAQ1: P2_DAQ1.15 U1.98 | length 1973
  Top Layer w8: v1(6739,5425) 6765.36,5398.64 U1.98@7023.64,5398.64
  Bottom Layer w8: v1(5317.06,4974.26) 5390.67,4974.26 5925.41,5509 v1(6049,5509) ; v1@6049,5507 6657,5507 v1(6739,5425)
C\S\_DAQ2: P2_DAQ2.15 U1.99 | length 3455.8
  Top Layer w8: P2_DAQ2.15@4674.43,4974 4744.57,4974 4776.63,5006.07 4776.63,5799.41 4948.23,5971 v1(5664,5971) ; v1(6795,5426) 6802.68,5418.32 U1.99@7023.64,5418.32
  Bottom Layer w8: v1(5664,5971) 5668,5971 6116,5523 6698,5523 v1(6795,5426)
C\S\_DAQ3: P2_DAQ3.15 U1.100 | length 4134.2
  Top Layer w8: P2_DAQ3.15@4029.86,4974 4100.5,4974 4133.94,5007.44 4133.94,5825.66 4312.28,6004 v1(5624,6004) ; v1(6796,5473) 6830.99,5438.01 U1.100@7023.64,5438.01
  Bottom Layer w8: v1(5624,6004) 5669,6004 6132,5541 6728,5541 v1(6796,5473)
C\S\_DAQ4: P2_DAQ4.15 U1.101 | length 4784.1
  Top Layer w8: P2_DAQ4.15@3385.29,4974 3455.04,4974 3489.87,5008.83 3489.87,5810.47 3711.41,6032 v1(5664,6032) ; v1(6847,5473) 6862.31,5457.69 U1.101@7023.64,5457.69
  Bottom Layer w8: v1(5664,6032) 5671,6032 6143,5560 6760,5560 v1(6847,5473)
C\S\_DAQ5: P2_DAQ5.15 U1.102 | length 5432.8
  Top Layer w8: P2_DAQ5.15@2740.71,4974 2806.75,4974 2847.17,5014.41 2847.17,5797.54 3109.63,6060 v1(5623,6060) ; v1(6847,5521) 6890.62,5477.38 U1.102@7023.64,5477.38
  Bottom Layer w8: v1(5623,6060) 5678,6060 6159,5579 6789,5579 v1(6847,5521)
C\S\_DAQ6: P2_DAQ6.15 U1.103 | length 6120.8
  Top Layer w8: P2_DAQ6.15@2096.14,4974 2165.28,4974 2203.66,5012.38 2203.66,5833.95 2464.71,6095 v1(5664,6095) ; v1(6895,5523) 6920.94,5497.06 U1.103@7023.64,5497.06
  Bottom Layer w8: v1(5664,6095) 5670,6095 6167,5598 6820,5598 v1(6895,5523)
C\S\_DAQ7: P2_DAQ7.15 U1.104 | length 6779.2
  Top Layer w8: P2_DAQ7.15@1451.57,4974 1519.76,4974 1562.2,5016.44 1562.2,5835.98 1849.21,6123 v1(5620,6123) ; v1(6892,5569) 6944.25,5516.75 U1.104@7023.64,5516.75
  Bottom Layer w8: v1(5620,6123) 5677,6123 6184,5616 6845,5616 v1(6892,5569)
C\S\_DAQ8: P2_DAQ8.15 U1.105 | length 7327
  Top Layer w8: P2_DAQ8.15@807,4974 878.29,4974 914.65,5010.36 914.65,5638.98 1426.67,6151 v1(5661,6151) ; v1(6938,5568) 6969.57,5536.43 U1.105@7023.64,5536.43
  Bottom Layer w8: v1(5661,6151) 5678,6151 6194,5635 6871,5635 v1(6938,5568)
CONVAB_DAQ1: P2_DAQ1.18 P2_DAQ2.18 P2_DAQ3.18 P2_DAQ4.18 P2_DAQ5.18 P2_DAQ6.18 P2_DAQ7.18 P2_DAQ8.18 U1.49 | length 13231.9
  Top Layer w8: P2_DAQ8.18@672,5024 571.72,5024 479.9,4932.18 479.9,4398.05 584.86,4293.09 v1(730.35,4293.09) ; v1(1120.63,4299.16) 1120.63,4907.37 1237.26,5024 P2_DAQ7.18@1316.57,5024 ; v1(1783.46,4299.94) 1765.61,4317.8 1765.61,4889.6 1900.01,5024 P2_DAQ6.18@1961.14,5024 ; v1(2432.89,4297.58) 2411.8,4318.67 2411.8,4917.5 2518.3,5024 P2_DAQ5.18@2605.71,5024 ; v1(3072.85,4299.55) 3044.04,4328.37 3044.04,4900.77 3167.27,5024 P2_DAQ4.18@3250.29,5024 ; v1(3719.13,4300.73) 3693.01,4326.85 3693.01,4931.45 3785.56,5024 P2_DAQ3.18@3894.86,5024 ; v1(4360.99,4300.36) 4326.18,4335.18 4326.18,4901.7 4448.48,5024 P2_DAQ2.18@4539.43,5024 ; v1(4974.33,4300.51) 4974.33,4874.01 5124.32,5024 P2_DAQ1.18@5184,5024 ; v1(6466.81,4568.38) 6498.05,4599.61 U1.49@6498.05,4833.68
  Bottom Layer w8: v1@733.25,4285.13 748.63,4300.51 v1(4974.33,4300.51) 6198.94,4300.51 v1(6466.81,4568.38)
D+: J1.3 U1.77 | length 562.3
  Top Layer w10: U1.77@7023.64,4985.25 7061.12,4985.25 7061.27,4985.41 7546.35,4985.41 J1.3@7574.31,5013.37
D-: J1.2 U1.76 | length 563.5
  Top Layer w10: U1.76@7023.64,4965.57 7061.12,4965.57 7061.27,4965.41 7543.53,4965.41 J1.2@7574.31,4934.63
DATA0: P2_DAQ1.47 P2_DAQ2.47 P2_DAQ3.47 P2_DAQ4.47 P2_DAQ5.47 P2_DAQ6.47 P2_DAQ7.47 P2_DAQ8.47 U1.114 | length 6404.3
  Top Layer w8: P2_DAQ1.47@5319,5774 5661,5774 5923,6036 6657.35,6036 6852.38,5840.97 U1.114@6852.38,5668.32
  Bottom Layer w8: v1(807,5774) v1(1451,5774) v1(2097,5774) v1@5316,5774
  other v1: 2739,5773 5317,5773 3384,5775 4029,5776 4673,5777
DATA1: P2_DAQ1.45 P2_DAQ2.45 P2_DAQ3.45 P2_DAQ4.45 P2_DAQ5.45 P2_DAQ6.45 P2_DAQ7.45 P2_DAQ8.45 U1.115 | length 6383.8
  Top Layer w8: P2_DAQ1.45@5319,5724 5639,5724 5931,6016 6649.22,6016 6832.69,5832.53 U1.115@6832.69,5668.32
  Bottom Layer w8: v1@808,5723 v1(2739,5723) v1(5317,5723)
  other v1: 807,5724 1451,5724 2097,5724 3384,5725 4029,5726 4673,5727
DATA2: P2_DAQ1.43 P2_DAQ2.43 P2_DAQ3.43 P2_DAQ4.43 P2_DAQ5.43 P2_DAQ6.43 P2_DAQ7.43 P2_DAQ8.43 U1.116 | length 6362
  Top Layer w8: P2_DAQ1.43@5319,5674 5616,5674 5938,5996 6638.85,5996 6813.01,5821.84 U1.116@6813.01,5668.32
  Bottom Layer w8: v1(807,5674) v1(1451,5674) v1(2097,5674) v1@5316,5674
  other v1: 2739,5673 5317,5673 3384,5675 4029,5676 4673,5677
DATA3: P2_DAQ1.41 P2_DAQ2.41 P2_DAQ3.41 P2_DAQ4.41 P2_DAQ5.41 P2_DAQ6.41 P2_DAQ7.41 P2_DAQ8.41 U1.117 | length 6344.5
  Top Layer w8: P2_DAQ1.41@5319,5624 5593,5624 5947,5978 6630.97,5978 6793.32,5815.65 U1.117@6793.32,5668.32
  Bottom Layer w8: v1@808,5623 v1(2739,5623) v1(5317,5623)
  other v1: 807,5624 1451,5624 2097,5624 3384,5625 4029,5626 4673,5627
DATA4: P2_DAQ1.39 P2_DAQ2.39 P2_DAQ3.39 P2_DAQ4.39 P2_DAQ5.39 P2_DAQ6.39 P2_DAQ7.39 P2_DAQ8.39 U1.131 | length 6115.3
  Top Layer w8: P2_DAQ1.39@5319,5574 5570,5574 5955,5959 6445,5959 6517.73,5886.27 U1.131@6517.73,5668.32
  Bottom Layer w8: v1(807,5574) v1(1451,5574) v1(2097,5574) v1@5316,5574
  other v1: 2739,5573 5317,5573 3384,5575 4029,5576 4673,5577
DATA5: P2_DAQ1.37 P2_DAQ2.37 P2_DAQ3.37 P2_DAQ4.37 P2_DAQ5.37 P2_DAQ6.37 P2_DAQ7.37 P2_DAQ8.37 U1.132 | length 6095.1
  Top Layer w8: P2_DAQ1.37@5319,5524 5549,5524 5965,5940 6435,5940 6498.05,5876.95 U1.132@6498.05,5668.32
  Bottom Layer w8: v1@808,5523 v1(2739,5523) v1(5317,5523)
  other v1: 807,5524 1451,5524 2097,5524 3384,5525 4029,5526 4673,5527
DATA6: P2_DAQ1.35 P2_DAQ2.35 P2_DAQ3.35 P2_DAQ4.35 P2_DAQ5.35 P2_DAQ6.35 P2_DAQ7.35 P2_DAQ8.35 U1.133 | length 6077.5
  Top Layer w8: P2_DAQ1.35@5319,5474 5528,5474 5976,5922 6427,5922 6478.36,5870.64 U1.133@6478.36,5668.32
  Bottom Layer w8: v1(807,5474) v1(1451,5474) v1(2097,5474) v1@5316,5474
  other v1: 2739,5473 5317,5473 3384,5475 4029,5476 4673,5477
DATA7: P2_DAQ1.33 P2_DAQ2.33 P2_DAQ3.33 P2_DAQ4.33 P2_DAQ5.33 P2_DAQ6.33 P2_DAQ7.33 P2_DAQ8.33 U1.134 | length 6056.2
  Top Layer w8: P2_DAQ1.33@5319,5424 5505,5424 5984,5903 6415,5903 6458.68,5859.32 U1.134@6458.68,5668.32
  Bottom Layer w8: v1@808,5423 v1(2739,5423) v1(5317,5423)
  other v1: 807,5424 1451,5424 2097,5424 3384,5425 4029,5426 4673,5427